# EAGLE board LUZES_18Fv3 (EAGLE 5.06)
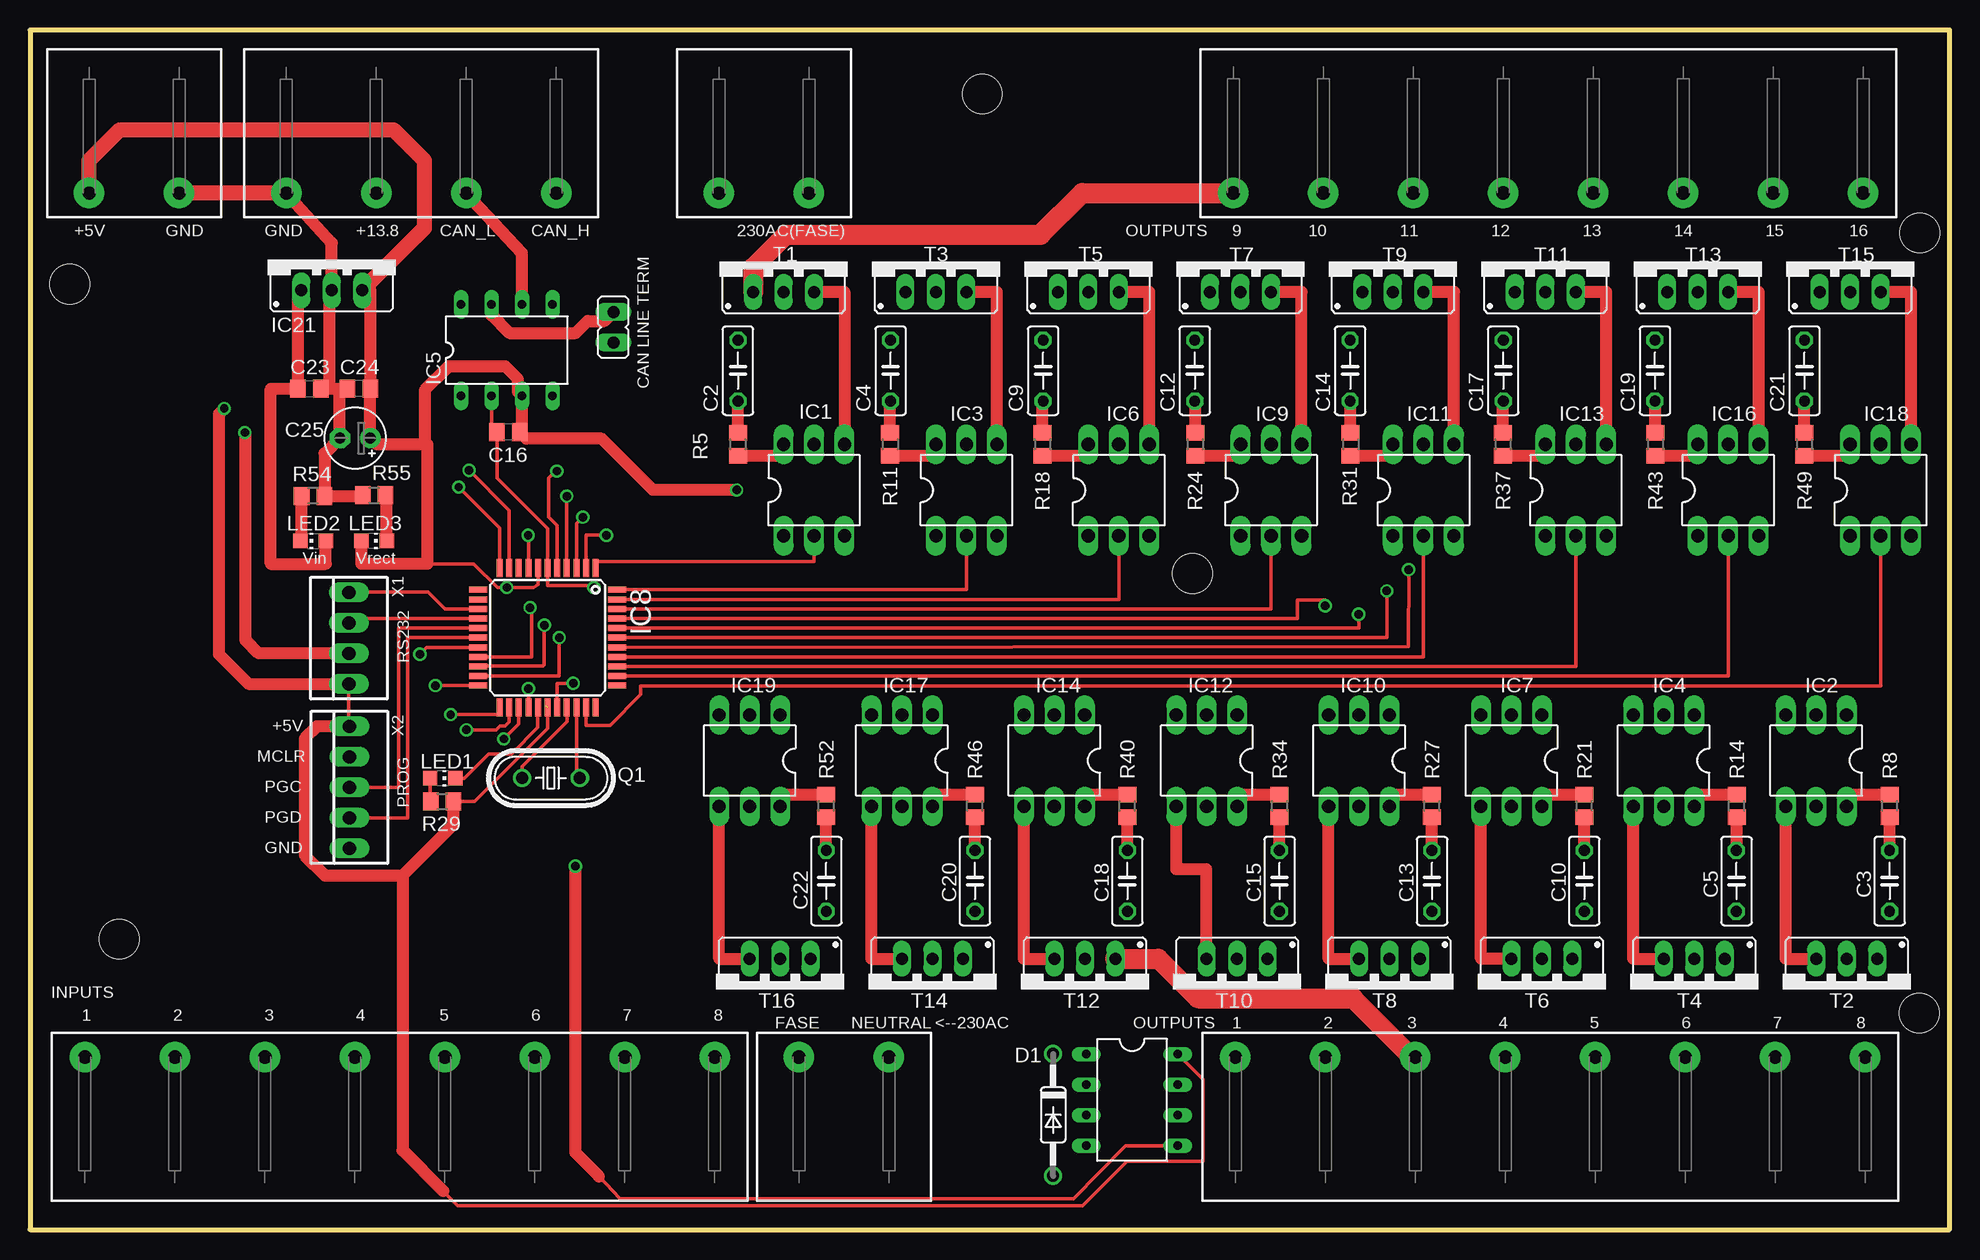
[diagram p0: board, top side]
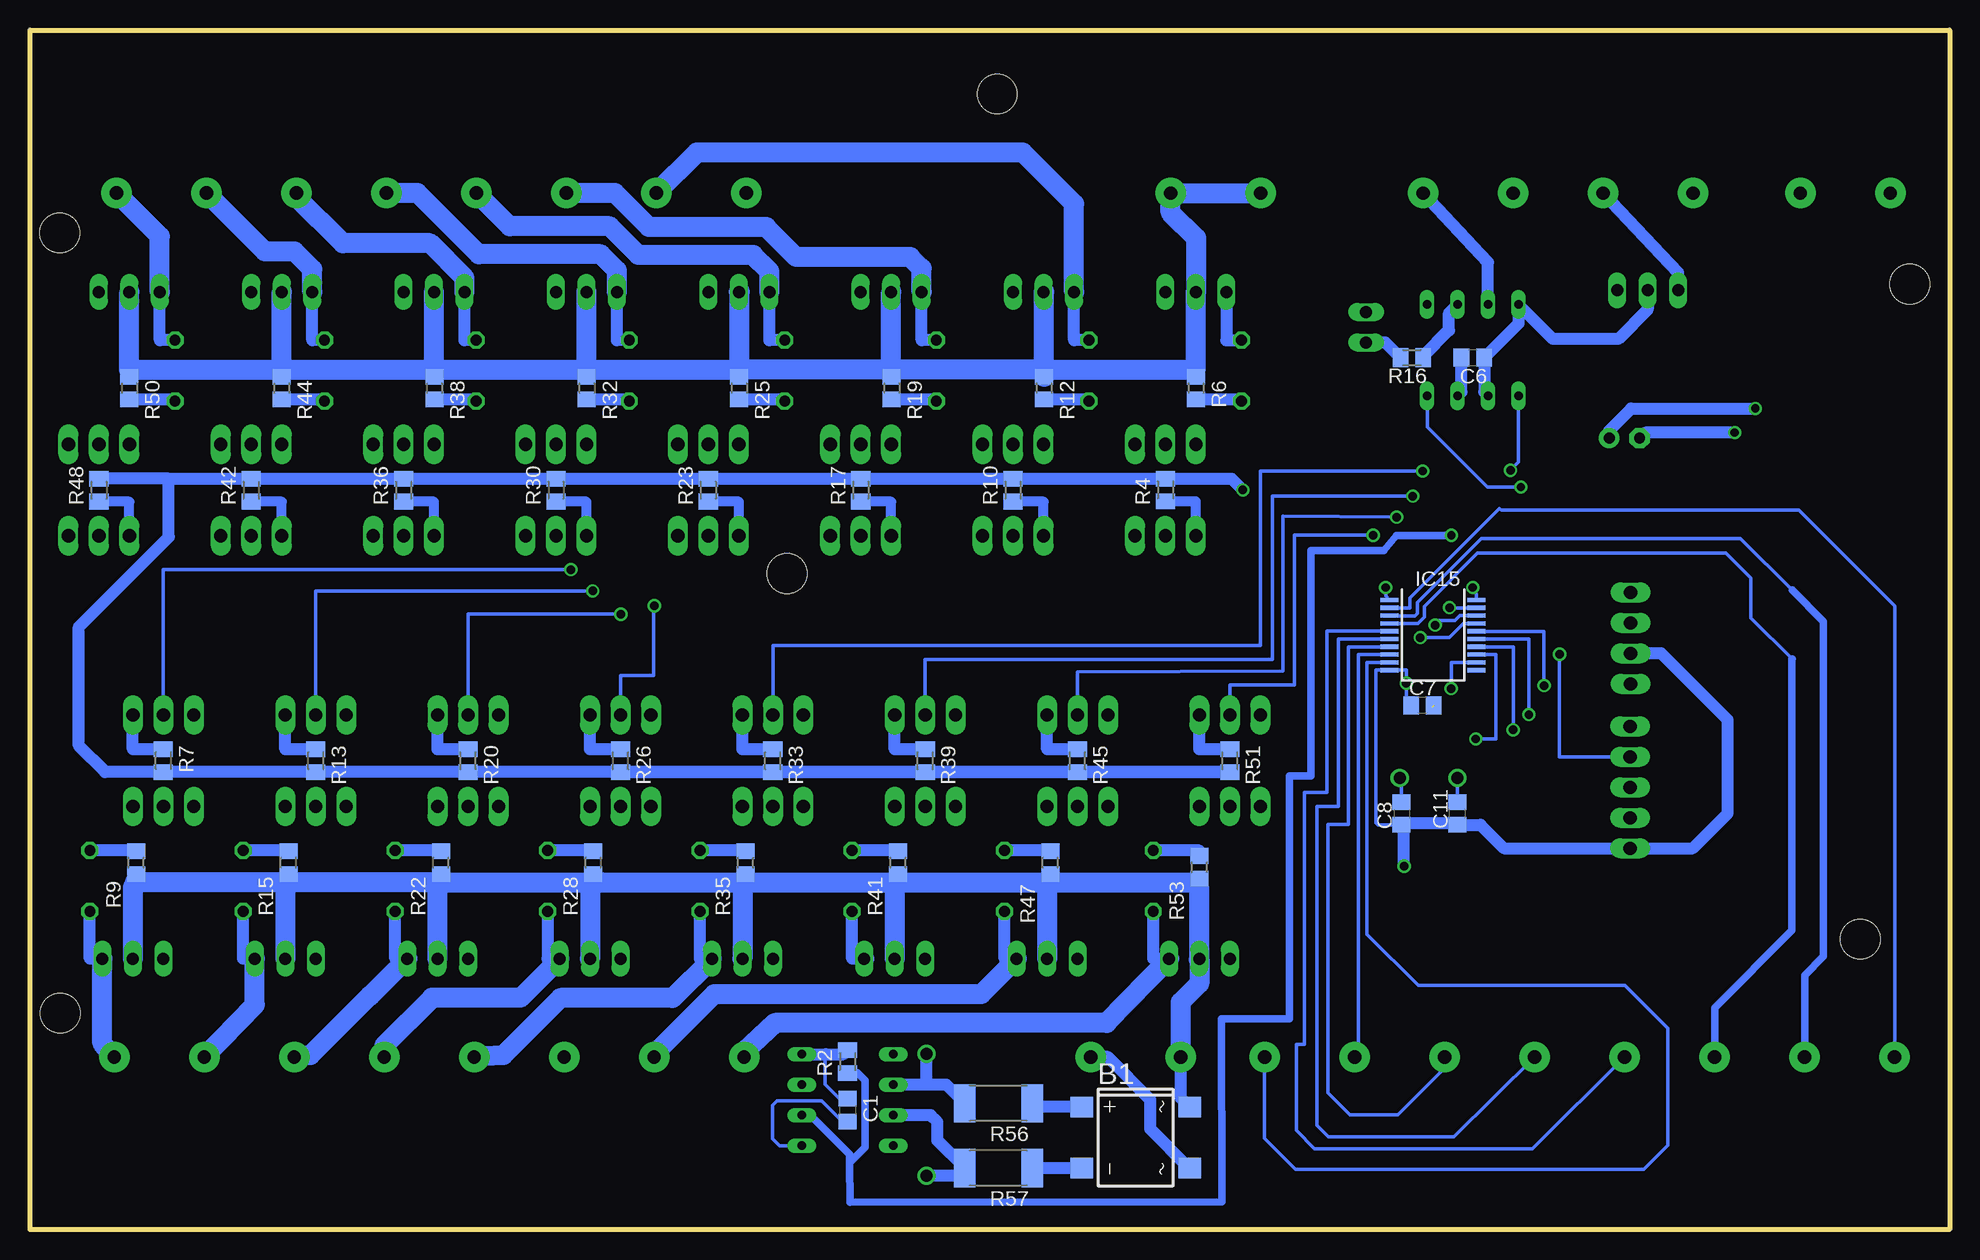
[diagram p1: board, bottom side, seen from below]

Size 160 x 100 mm. Coordinates in mm from the lower left corner, seen from the top.
Outline: 0,100 0,0 160,0 160,100 0,100
Copper layers (1*16): Top 0.035mm / dielectric 1.5mm / Bottom 0.035mm
Design rules "10mils": minimum track width 10mil, minimum drill 24mil, track to track 10mil, track to pad 10mil, pad to pad 10mil, via to via 10mil, smd to smd 10mil, copper to edge 40mil, drill to drill 10mil, minimum pad ring 10mil, minimum via ring 8mil, stop-mask expansion 0mil, vias tented up to drill 0mil, thermal gap 10mil
Holes 3.3 mm at 7.45,24.21 3.31,78.81 96.88,54.68 79.38,94.66 157.52,83.08 157.47,18.04

## Footprints (pad centres in the part's own frame; a part is rotated, then mirrored left to right if it is on the bottom)
DIL08 = drill 0.7 long: 1 -3.81,-3.81; 2 -1.27,-3.81; 3 1.27,-3.81; 4 3.81,-3.81; 5 3.81,3.81; 6 1.27,3.81; 7 -1.27,3.81; 8 -3.81,3.81
DBS = smd 1.7 x 1.9: + -2.55,-4.5; - 2.55,-4.5; AC1 -2.55,4.5; AC2 2.55,4.5
C0805 = smd 1.3 x 1.5: 1 -0.95,0; 2 0.95,0
C050-025X075 = drill 0.9 octagon: 1 -2.54,0; 2 2.54,0
E2,5-5 = drill 0.9 pad 1.7 round: + -1.27,0 | drill 0.9 pad 1.7 octagon: - 1.27,0
CTB9550-2 = drill 1.1 pad 2.54 round: P$1 0,0; P$2 7.5,0
CTB9550-4 = drill 1.1 pad 2.54 round: P$1 0,0; P$2 7.5,0; P$3 15,0; P$4 22.5,0
CTB9550-8 = drill 1.1 pad 2.54 round: P$9 0,0; P$10 7.5,0; P$11 15,0; P$12 22.5,0; P$13 30,0; P$14 37.5,0; P$15 45,0; P$16 52.5,0
JP1 = drill 1 long: 1 0,-1.27; 2 0,1.27
DO35-10 = drill 1 round: A 5.08,0; C -5.08,0
DIL06 = drill 1.1 long: 1 -2.54,-3.81; 2 0,-3.81; 3 2.54,-3.81; 4 2.54,3.81; 5 0,3.81; 6 -2.54,3.81
TQFP44@1 = smd 1.5 x 0.5: 1 -5.8,4; 2 -5.8,3.2; 3 -5.8,2.4; 4 -5.8,1.6; 5 -5.8,0.8; 6 -5.8,0; 7 -5.8,-0.8; 8 -5.8,-1.6; 9 -5.8,-2.4; 10 -5.8,-3.2; 11 -5.8,-4; 23 5.8,-4; 24 5.8,-3.2; 25 5.8,-2.4; 26 5.8,-1.6; 27 5.8,-0.8; 28 5.8,0; 29 5.8,0.8; 30 5.8,1.6; 31 5.8,2.4; 32 5.8,3.2; 33 5.8,4 | smd 0.5 x 1.5: 12 -4,-5.8; 13 -3.2,-5.8; 14 -2.4,-5.8; 15 -1.6,-5.8; 16 -0.8,-5.8; 17 0,-5.8; 18 0.8,-5.8; 19 1.6,-5.8; 20 2.4,-5.8; 21 3.2,-5.8; 22 4,-5.8; 34 4,5.8; 35 3.2,5.8; 36 2.4,5.8; 37 1.6,5.8; 38 0.8,5.8; 39 0,5.8; 40 -0.8,5.8; 41 -1.6,5.8; 42 -2.4,5.8; 43 -3.2,5.8; 44 -4,5.8
SSOP20_SMALL = smd 0.349 x 1.5: 1 -2.925,-3.625; 2 -2.275,-3.625; 3 -1.625,-3.625; 4 -0.975,-3.625; 5 -0.325,-3.625; 6 0.325,-3.625; 7 0.975,-3.625; 8 1.625,-3.625; 9 2.275,-3.625; 10 2.925,-3.625; 11 2.925,3.625; 12 2.275,3.625; 13 1.625,3.625; 14 0.975,3.625; 15 0.325,3.625; 16 -0.325,3.625; 17 -0.975,3.625; 18 -1.625,3.625; 19 -2.275,3.625; 20 -2.925,3.625
78XXS = drill 1 long: GND 0,-2.54; IN -2.54,-2.54; OUT 2.54,-2.54
CHIP-LED0805 = smd 1.2 x 1.2: A 0,-1.05; C 0,1.05
HC49U-V = drill 1 round: 1 -2.413,0; 2 2.413,0
M0805 = smd 1.3 x 1.6: 1 -0.95,0; 2 0.95,0
R0805 = smd 1.3 x 1.5: 1 -0.95,0; 2 0.95,0
R2512 = smd 1.8 x 3.2: 1 -2.8,0; 2 2.8,0
TO220DS = drill 1 long: A1 -2.54,-2.54; A2 0,-2.54; G 2.54,-2.54
22-23-2041 = drill 1.1 long: 1 -3.81,0; 2 -1.27,0; 3 1.27,0; 4 3.81,0
22-23-2051 = drill 1.1 long: 1 -5.08,0; 2 -2.54,0; 3 0,0; 4 2.54,0; 5 5.08,0

## Placement (x,y rotation side)
1  6N138  [DIL08]  91.86,10.8 270 top
B1  DBS107G  [DBS]  67.84,7.67 270 bottom
C1  100n  [C0805]  91.86,9.96 270 bottom
C2  0.05u  [C050-025X075]  59.01,71.6 90 top
C3  0.05u  [C050-025X075]  155.01,29.06 270 top
C4  0.05u  [C050-025X075]  71.74,71.6 90 top
C5  0.05u  [C050-025X075]  142.24,29.06 270 top
C6  100n  [C0805]  39.74,72.68 0 bottom
C7  100n  [C0805]  43.94,43.68 180 bottom
C8  22pF  [C0805]  45.67,34.68 270 bottom
C9  0.05u  [C050-025X075]  84.45,71.6 90 top
C10  0.05u  [C050-025X075]  129.56,29.06 270 top
C11  22pF  [C0805]  41.01,34.68 90 bottom
C12  0.05u  [C050-025X075]  97.09,71.6 90 top
C13  0.05u  [C050-025X075]  116.86,29.06 270 top
C14  0.05u  [C050-025X075]  110.05,71.6 90 top
C15  0.05u  [C050-025X075]  104.16,29.06 270 top
C16  100n  [C0805]  39.88,66.47 180 top
C17  0.05u  [C050-025X075]  122.81,71.6 90 top
C18  0.05u  [C050-025X075]  91.47,29.06 270 top
C19  0.05u  [C050-025X075]  135.45,71.6 90 top
C20  0.05u  [C050-025X075]  78.76,29.06 270 top
C21  0.05u  [C050-025X075]  147.91,71.6 90 top
C22  0.05u  [C050-025X075]  66.37,29.06 270 top
C23  100n  [C0805]  23.29,70.1 0 top
C24  100n  [C0805]  27.41,70.1 180 top
C25  47u  [E2,5-5]  27.1,65.98 180 top
CAMDEN_2P1  [CTB9550-2]  71.59,14.38 180 top
CAMDEN_2P2  [CTB9550-2]  57.42,86.41 0 top
CAMDEN_2P3  [CTB9550-2]  4.93,86.41 0 top
CAMDEN_4P-1  [CTB9550-4]  21.37,86.41 0 top
CAMDEN_8P-1  [CTB9550-8]  100.29,86.42 0 top
CAMDEN_8P-2  [CTB9550-8]  152.97,14.38 180 top
CAMDEN_8P-3  [CTB9550-8]  57.08,14.38 180 top
CAN_LINE_TERM  [JP1]  48.63,75.22 180 top
D1  1N4148  [DO35-10]  85.28,9.56 270 top
IC1  MOC3022  [DIL06]  65.35,61.64 0 top
IC2  MOC3022  [DIL06]  148.88,39.09 180 top
IC3  MOC3022  [DIL06]  78.05,61.64 0 top
IC4  MOC3022  [DIL06]  136.18,39.09 180 top
IC5  MCP2551  [DIL08]  39.74,73.31 0 top
IC6  MOC3022  [DIL06]  90.75,61.64 0 top
IC7  MOC3022  [DIL06]  123.48,39.09 180 top
IC8  PIC18F4682  [TQFP44@1]  43.14,49.34 270 top
IC9  MOC3022  [DIL06]  103.45,61.64 0 top
IC10  MOC3022  [DIL06]  110.78,39.09 180 top
IC11  MOC3022  [DIL06]  116.15,61.64 0 top
IC12  MOC3022  [DIL06]  98.08,39.09 180 top
IC13  MOC3022  [DIL06]  128.85,61.64 0 top
IC14  MOC3022  [DIL06]  85.38,39.09 180 top
IC15  MAX6818  [SSOP20_SMALL]  43.05,49.55 270 bottom
IC16  MOC3022  [DIL06]  141.55,61.64 0 top
IC17  MOC3022  [DIL06]  72.68,39.09 180 top
IC18  MOC3022  [DIL06]  154.25,61.64 0 top
IC19  MOC3022  [DIL06]  59.98,39.09 180 top
IC21  [78XXS]  25.16,80.84 0 top
LED1  [CHIP-LED0805]  34.4,37.61 270 top
LED2  [CHIP-LED0805]  23.6,57.4 90 top
LED3  [CHIP-LED0805]  28.68,57.4 270 top
Q1  10MHz  [HC49U-V]  43.42,37.63 0 top
R2  2K21  [M0805]  91.86,14.01 90 bottom
R4  330  [M0805]  65.36,61.65 90 bottom
R5  360  [R0805]  59,65.45 270 top
R6  470  [R0805]  62.81,70.15 270 bottom
R7  330  [M0805]  148.88,39.09 270 bottom
R8  360  [R0805]  155.01,35.31 90 top
R9  470  [R0805]  151.15,30.58 90 bottom
R10  330  [M0805]  78.06,61.64 90 bottom
R11  360  [R0805]  71.7,65.45 270 top
R12  470  [R0805]  75.47,70.15 270 bottom
R13  330  [M0805]  136.18,39.08 270 bottom
R14  360  [R0805]  142.26,35.31 90 top
R15  470  [R0805]  138.45,30.58 90 bottom
R16  120  [M0805]  44.82,72.68 180 bottom
R17  330  [M0805]  90.75,61.64 90 bottom
R18  360  [R0805]  84.4,65.45 270 top
R19  470  [R0805]  88.17,70.15 270 bottom
R20  330  [M0805]  123.48,39.08 270 bottom
R21  360  [R0805]  129.56,35.31 90 top
R22  470  [R0805]  125.75,30.58 90 bottom
R23  330  [M0805]  103.45,61.64 90 bottom
R24  360  [R0805]  97.13,65.45 270 top
R25  470  [R0805]  100.88,70.15 270 bottom
R26  330  [M0805]  110.78,39.08 270 bottom
R27  360  [R0805]  116.86,35.31 90 top
R28  470  [R0805]  113.05,30.58 90 bottom
R29  560  [R0805]  34.35,35.69 0 top
R30  330  [M0805]  116.16,61.64 90 bottom
R31  360  [R0805]  110.08,65.45 270 top
R32  470  [R0805]  113.59,70.15 270 bottom
R33  330  [M0805]  98.09,39.08 270 bottom
R34  360  [R0805]  104.16,35.31 90 top
R35  470  [R0805]  100.35,30.58 90 bottom
R36  330  [M0805]  128.86,61.64 90 bottom
R37  360  [R0805]  122.78,65.45 270 top
R38  470  [R0805]  126.29,70.15 270 bottom
R39  330  [M0805]  85.38,39.08 270 bottom
R40  360  [R0805]  91.46,35.31 90 top
R41  470  [R0805]  87.65,30.58 90 bottom
R42  330  [M0805]  141.57,61.64 90 bottom
R43  360  [R0805]  135.48,65.45 270 top
R44  470  [R0805]  139.02,70.15 270 bottom
R45  330  [M0805]  72.69,39.08 270 bottom
R46  360  [R0805]  78.76,35.31 90 top
R47  470  [R0805]  74.95,30.58 90 bottom
R48  330  [M0805]  154.25,61.64 90 bottom
R49  360  [R0805]  147.9,65.45 270 top
R50  470  [R0805]  151.71,70.15 270 bottom
R51  330  [M0805]  59.98,39.09 270 bottom
R52  360  [R0805]  66.37,35.31 90 top
R53  470  [R0805]  62.52,30.2 90 bottom
R54  560  [R0805]  23.6,61.16 180 top
R55  560  [R0805]  28.68,61.21 0 top
R56  20K  [R2512]  79.27,10.52 180 bottom
R57  20K  [R2512]  79.27,5.13 180 bottom
T1  BTA216  [TO220DS]  62.81,80.69 0 top
T2  BTA216  [TO220DS]  151.42,20.04 180 top
T3  BTA216->>  [TO220DS]  75.51,80.69 0 top
T4  BTA216  [TO220DS]  138.72,20.04 180 top
T5  BTA216  [TO220DS]  88.21,80.69 0 top
T6  BTA216  [TO220DS]  126.02,20.04 180 top
T7  BTA216  [TO220DS]  100.91,80.69 0 top
T8  BTA216  [TO220DS]  113.32,20.04 180 top
T9  BTA216  [TO220DS]  113.61,80.69 0 top
T10  BTA216  [TO220DS]  100.62,20.04 180 top
T11  BTA216  [TO220DS]  126.31,80.69 0 top
T12  BTA216  [TO220DS]  87.92,20.04 180 top
T13  BTA216  [TO220DS]  139.01,80.69 0 top
T14  BTA216  [TO220DS]  75.22,20.04 180 top
T15  BTA216  [TO220DS]  151.71,80.69 0 top
T16  BTA216  [TO220DS]  62.52,20.04 180 top
X1  22-23-2041  [22-23-2041]  26.58,49.3 90 top
X2  22-23-2051  [22-23-2051]  26.63,36.86 90 top

## Library data of the parts
1 = optocoupler
B1 = rectifier
C1-C25 R2 R4-R57 = rcl
CAMDEN_2P1-CAMDEN_2P3 CAMDEN_4P-1 CAMDEN_8P-1-CAMDEN_8P-3 = mycomponents
CAN_LINE_TERM = jumper
D1 = diode
IC1-IC4 IC6 IC7 IC9-IC14 IC16-IC19 = ic-package
IC5 = micro-philips
IC8 = microchip
IC15 = maxim
IC21 = v-reg
LED1-LED3 = led
Q1 = crystal
T1-T16 = triac
X1 X2 = con-molex

## Nets
+5V: 1.8 C1.1 C6.1 C7.1 C16.1 C24.1 C25.+ CAMDEN_2P3.P$1 IC5.3 IC8.7 IC8.28 IC15.20 IC21.OUT LED3.A R2.2 R4.2 R7.2 R10.2 R13.2 R17.2 R20.2 R23.2 R26.2 R29.2 R30.2 R33.2 R36.2 R39.2 R42.2 R45.2 R48.2 R51.2 X1.1 X2.5
+18V: 1.6 IC8.8 R2.1
CAN_H: CAMDEN_4P-1.P$4 CAN_LINE_TERM.1 IC5.7
CAN_L: CAMDEN_4P-1.P$3 IC5.6 R16.1
CAN_RX(TTL): IC5.4 IC8.11
CAN_TX(TTL): IC5.1 IC8.10
GND: 1.5 C1.2 C6.2 C7.2 C8.2 C11.1 C16.2 C23.2 C24.2 C25.- CAMDEN_2P3.P$2 CAMDEN_4P-1.P$1 IC5.2 IC5.8 IC8.6 IC8.29 IC15.1 IC15.10 IC21.GND R54.1 R55.1 X1.2 X2.1
INPUT1: IC8.19 IC15.19
INPUT2: IC8.20 IC15.18
INPUT3: IC8.21 IC15.17
INPUT4: IC8.22 IC15.16
INPUT5: IC8.23 IC15.15
INPUT6: IC8.24 IC15.14
INPUT7: IC8.25 IC15.13
INPUT8: IC8.26 IC15.12
MCLR: IC8.18 X2.4
N$1: C8.1 IC8.31 Q1.2
N$2: C11.2 IC8.30 Q1.1
N$3: B1.AC1 CAMDEN_2P1.P$2 R9.1 R15.1 R22.1 R28.1 R35.1 R41.1 R47.1 R53.1 T2.A2 T4.A2 T6.A2 T8.A2 T10.A2 T12.A2 T14.A2 T16.A2
N$4: B1.AC2 CAMDEN_2P1.P$1
N$5: B1.+ R56.1
N$6: CAMDEN_8P-3.P$16 IC15.2
N$7: CAMDEN_8P-3.P$15 IC15.3
N$8: CAMDEN_8P-3.P$9 IC15.9
N$9: CAMDEN_8P-3.P$10 IC15.8
N$10: CAMDEN_8P-3.P$11 IC15.7
N$11: CAMDEN_8P-3.P$14 IC15.4
N$12: CAMDEN_8P-3.P$13 IC15.5
N$13: CAMDEN_8P-3.P$12 IC15.6
N$16: IC3.6 R11.2
N$17: IC6.6 R18.2
N$18: IC9.6 R24.2
N$20: IC2.6 R8.2
N$25: IC4.6 R14.2
N$27: IC11.6 R31.2
N$29: IC13.6 R37.2
N$30: IC16.6 R43.2
N$33: IC17.6 R46.2
N$34: IC14.6 R40.2
N$35: IC12.6 R34.2
N$36: IC10.6 R27.2
N$37: IC7.6 R21.2
N$38: LED1.A R29.1
N$39: IC8.27 LED1.C
N$40: IC18.6 R49.2
N$41: IC19.6 R52.2
N$46: CAMDEN_2P2.P$1 CAMDEN_2P2.P$2 R6.1 R12.1 R19.1 R25.1 R32.1 R38.1 R44.1 R50.1 T1.A2 T3.A2 T5.A2 T7.A2 T9.A2 T11.A2 T13.A2 T15.A2
N$111: C23.1 CAMDEN_4P-1.P$2 IC21.IN LED2.A
N$112: LED2.C R54.2
N$115: LED3.C R55.2
N$116: 1.2 D1.C R56.2
N$117: B1.- R57.1
N$118: 1.3 D1.A R57.2
N$119: IC1.1 R4.1
N$120: IC1.6 R5.2
N$121: C2.1 R5.1 R6.2
N$123: IC1.4 T1.G
N$125: IC3.1 R10.1
N$127: C4.1 R11.1 R12.2
N$129: IC3.4 T3.G
N$131: IC6.1 R17.1
N$133: C9.1 R18.1 R19.2
N$135: IC6.4 T5.G
N$137: IC9.1 R23.1
N$139: C12.1 R24.1 R25.2
N$141: IC9.4 T7.G
N$143: IC11.1 R30.1
N$145: C14.1 R31.1 R32.2
N$147: IC11.4 T9.G
N$149: IC13.1 R36.1
N$151: C17.1 R37.1 R38.2
N$153: IC13.4 T11.G
N$155: IC16.1 R42.1
N$157: C19.1 R43.1 R44.2
N$159: IC16.4 T13.G
N$161: IC18.1 R48.1
N$163: C21.1 R49.1 R50.2
N$165: IC18.4 T15.G
N$168: IC2.1 R7.1
N$170: C3.1 R8.1 R9.2
N$172: IC2.4 T2.G
N$174: IC4.1 R13.1
N$176: C5.1 R14.1 R15.2
N$178: IC4.4 T4.G
N$180: IC7.1 R20.1
N$182: C10.1 R21.1 R22.2
N$184: IC7.4 T6.G
N$186: IC10.1 R26.1
N$188: C13.1 R27.1 R28.2
N$190: IC10.4 T8.G
N$192: IC12.1 R33.1
N$194: C15.1 R34.1 R35.2
N$196: IC12.4 T10.G
N$198: IC14.1 R39.1
N$200: C18.1 R40.1 R41.2
N$202: IC14.4 T12.G
N$204: IC17.1 R45.1
N$206: C20.1 R46.1 R47.2
N$208: IC17.4 T14.G
N$210: IC19.1 R51.1
N$212: C22.1 R52.1 R53.2
N$214: IC19.4 T16.G
N$217: CAN_LINE_TERM.2 R16.2
OUT1: IC8.32 IC18.2
OUT2: IC8.35 IC16.2
OUT3: IC8.36 IC13.2
OUT4: IC8.37 IC11.2
OUT5: IC8.42 IC9.2
OUT6: IC6.2 IC8.43
OUT7: IC3.2 IC8.44
OUT8: IC1.2 IC8.1
OUT9: IC2.2 IC8.38
OUT10: IC4.2 IC8.39
OUT11: IC7.2 IC8.40
OUT12: IC8.41 IC10.2
OUT13: IC8.5 IC12.2
OUT14: IC8.4 IC14.2
OUT15: IC8.3 IC17.2
OUT16: IC8.2 IC19.2
OUTPUT1: C22.2 CAMDEN_8P-2.P$16 T16.A1
OUTPUT2: C20.2 CAMDEN_8P-2.P$15 T14.A1
OUTPUT3: C18.2 CAMDEN_8P-2.P$14 T12.A1
OUTPUT4: C15.2 CAMDEN_8P-2.P$13 T10.A1
OUTPUT5: C13.2 CAMDEN_8P-2.P$12 T8.A1
OUTPUT6: C10.2 CAMDEN_8P-2.P$11 T6.A1
OUTPUT7: C5.2 CAMDEN_8P-2.P$10 T4.A1
OUTPUT8: C3.2 CAMDEN_8P-2.P$9 T2.A1
OUTPUT9: C2.2 CAMDEN_8P-1.P$9 T1.A1
OUTPUT10: C4.2 CAMDEN_8P-1.P$10 T3.A1
OUTPUT11: C9.2 CAMDEN_8P-1.P$11 T5.A1
OUTPUT12: C12.2 CAMDEN_8P-1.P$12 T7.A1
OUTPUT13: C14.2 CAMDEN_8P-1.P$13 T9.A1
OUTPUT14: C17.2 CAMDEN_8P-1.P$14 T11.A1
OUTPUT15: C19.2 CAMDEN_8P-1.P$15 T13.A1
OUTPUT16: C21.2 CAMDEN_8P-1.P$16 T15.A1
PGC: IC8.16 X2.3
PGD: IC8.17 X2.2
RS232_RX: IC8.14 X1.4
RS232_TX: IC8.15 X1.3

## Tracks (layer width: path | path; a pad name or v marks a point on that pad's centre or on a via)
+5V  (via drill 0.7)  (1 unrouted)
  Top 0.305: IC8.28 43.16,43.52 43.16,42.49 43.16,41.76 37.08,35.69 R29.2 | X1.1 26.58,41.99 X2.5 | C16.1 41,66.65 | IC8.7 42.35,53.77 41.97,53.51 v39.74,53.52 39.64,53.51 38.98,53.51 36.99,55.49 33.12,55.49 | 34.45,3.2 35.65,2 87.73,2 91.43,5.7 97.76,5.7 97.76,12.52 1.8
  Top 1.016: 32.91,65.44 28.9,65.44 C25.+ 28.37,69.47 C24.1 28.36,78.3 IC21.OUT | LED3.A 27.63,55.49 33.12,55.49 33.12,65.44 32.91,65.44 | 41,66.65 IC5.3 40.68,69.82 40.68,70.89 39.63,71.94 34.89,71.94 32.91,69.96 32.91,65.44 | C16.1 41.38,65.92 47.66,65.92 51.93,61.65 v58.9,61.65 | X1.1 18.21,45.49 15.74,47.97 15.74,68 v16.18,68.44 | X2.5 23.92,41.94 22.91,40.93 22.91,31.2 24.6,29.52 31.05,29.52 | 31.05,29.52 35.3,33.77 R29.2 | 31.05,29.52 31.05,6.59 34.45,3.2 | 1.8 95.16,14.61
  Top 1.27: CAMDEN_2P3.P$1 4.93,89.14 7.47,91.68 30.33,91.68 32.87,89.14 32.87,83.47 IC21.OUT
  Bottom 0.305: C1.1 92.53,10.91 93.74,12.12 93.74,14.55 93.68,14.61 | IC15.20 39.42,52.98 v39.74,53.52
  Bottom 0.813: R10.2 78.06,62.6
  Bottom 1.016: 78.06,62.6 R4.2 59.85,62.6 v58.9,61.65 | R10.2 R17.2 R23.2 R30.2 R36.2 R42.2 148.43,62.59 | 148.43,62.59 R48.2 | R20.2 R26.2 R33.2 R39.2 R45.2 R51.2 153.73,38.14 155.92,40.33 155.92,50.24 148.43,57.73 148.43,62.59 | R20.2 | R20.2 R13.2 | R13.2 | R13.2 R7.2 | C6.1 40.68,69.82 IC5.3 | v16.18,68.44 26.52,68.44 28.37,66.6 C25.+ | R2.2 92.21,14.61 93.68,14.61 1.8
+18V  (via drill 0.7)
  Top 0.305: IC8.8 41.54,57.85 v41.52,57.87
  Bottom 0.61: v41.52,57.87 46.09,57.87 47.14,56.62 53.24,56.62 53.24,37.82 55.03,37.82 55.03,17.57 60.69,17.57 60.66,2.33 91.66,2.28 91.69,5.55 | R2.1 91.01,13.06 90.38,12.43 90.38,6.86 91.69,5.55 | 91.69,5.55 91.69,6.27 94.95,9.53 1.6
CAN_H
  Top 1.016: CAN_LINE_TERM.1 47.88,75.74 46.49,75.74 45.48,74.73 39.94,74.73 38.46,76.21 IC5.7
  Bottom 1.016: IC5.7 38.46,80.63 CAMDEN_4P-1.P$4
CAN_L
  Top 1.016: CAMDEN_4P-1.P$3 41,81.4 IC5.6
  Bottom 1.016: IC5.6 41.72,76.41 41.72,74.97 43.86,72.83 R16.1
CAN_RX(TTL)  (via drill 0.7)
  Top 0.305: IC8.11 39.14,58.48 v35.73,61.89
  Bottom 0.305: v35.73,61.89 38.53,61.89 43.53,66.89 43.53,69.49 IC5.4
CAN_TX(TTL)  (via drill 0.7)
  Top 0.305: v36.6,63.3 39.94,59.96 IC8.10
  Bottom 0.305: IC5.1 35.92,63.97 v36.6,63.3
GND  (via drill 0.7)
  Top 0.305: v47,53.52 46.59,53.7 43.15,53.7 43.14,53.71 IC8.6 43.14,58.43 38.93,62.65 C16.2 38.46,66.94 IC5.2 | v45.28,45.53 43.94,45.53 IC8.29 | 47.43,4.43 49.18,2.57 86.98,2.57 91.29,6.99 1.5
  Top 1.016: CAMDEN_4P-1.P$1 25.16,82.24 IC21.GND 24.99,78.14 24.99,70.08 | 24.99,70.08 24.97,70.1 C23.2 | 25.81,70.08 C24.2 | 25.81,70.08 24.99,70.08 | 25.81,70.08 25.83,70.06 C25.- 24.55,64.7 R54.1 27.73,61.16 R55.1 | X1.2 19.07,48.03 17.96,49.14 17.96,66.38 v17.9,66.44 | v45.46,30.3 45.46,6.4 47.43,4.43
  Top 1.27: CAMDEN_4P-1.P$1 CAMDEN_2P3.P$2
  Bottom 0.305: IC15.1 46.99,52.79 v47,53.52 | 47.82,33.9 47.82,46.63 IC15.10 45.28,46.63 v45.28,45.53 45.28,44.07 C7.2 | C11.1 40.98,34.02 | C1.2 92.31,9.01 94.04,10.75 97.71,10.75 98.12,10.34 98.12,7.58 97.51,6.97 95.69,6.97 1.5 | 47.82,33.9 47.82,46.31 | C8.2 47.66,33.73 47.82,33.9
  Bottom 1.016: IC21.GND 25.16,76.71 27.62,74.25 33.05,74.25 IC5.8 35.92,75.54 C6.2 38.78,69.82 IC5.2 | v17.9,66.44 25.37,66.44 C25.- | X1.2 24.03,48.03 18.49,42.48 18.49,34.69 21.4,31.77 26.62,31.77 X2.1 37.13,31.78 39.1,33.75 C11.1 41.15,33.88 45.46,33.88 | v45.46,30.3 45.46,33.88 | 45.46,33.88 C8.2
INPUT1  (via drill 0.7)
  Top 0.305: v41.68,51.85 41.82,51.85 41.82,47.71 37.34,47.71 IC8.19
  Bottom 0.305: IC15.19 41.68,51.83 v41.68,51.85
INPUT2  (via drill 0.7)
  Top 0.305: v42.87,50.39 42.87,47.08 42.78,46.99 37.39,46.99 IC8.20
  Bottom 0.305: IC15.18 40.83,51.18 41.23,50.77 42.85,50.77 v42.87,50.39
INPUT3  (via drill 0.7)
  Top 0.305: v44.11,49.35 44.11,46.14 IC8.21
  Bottom 0.305: IC15.17 40.52,50.53 41.7,49.35 v44.11,49.35
INPUT4  (via drill 0.7)
  Top 0.305: v33.8,45.35 v33.8,45.34 IC8.22
  Bottom 0.305: IC15.16 39.42,49.86 33.8,49.86 v33.8,45.35
INPUT5  (via drill 0.7)
  Top 0.305: v35.06,42.93 39.14,42.93 IC8.23
  Bottom 0.305: IC15.15 35.06,49.23 v35.06,42.93
INPUT6  (via drill 0.7)
  Top 0.305: v36.37,41.65 38.87,41.65 39.2,41.99 39.62,41.99 39.93,42.3 IC8.24
  Bottom 0.305: IC15.14 36.37,48.58 v36.37,41.65
INPUT7  (via drill 0.7)
  Top 0.305: IC8.25 40.74,42.15 v39.48,40.89
  Bottom 0.305: v39.48,40.89 37.8,40.89 37.8,47.94 IC15.13
INPUT8  (via drill 0.7)
  Top 0.305: IC8.26 41.54,45.4 v41.54,45.1
  Bottom 0.305: v41.54,45.1 41.54,47.28 IC15.12
MCLR  (via drill 0.7)
  Top 0.305: v32.51,47.97 33.08,48.54 IC8.18
  Bottom 0.305: X2.4 32.51,39.4 v32.51,47.97
N$1
  Top 0.305: IC8.31 45.54,37.92 Q1.2
  Bottom 0.305: C8.1 45.67,37.47 Q1.2
N$2
  Top 0.305: IC8.30 44.75,43.53 44.75,42.35 41,38.6 Q1.1
  Bottom 0.305: C11.2 Q1.1
N$3
  Bottom 0.305: R15.1 138.45,29.07 138.58,28.94 | R9.1 151.15,29.02 151.23,28.94 | R22.1 125.75,29.01 125.68,28.94 | R28.1 113.03,29.63 112.34,28.94 | R35.1 100.35,29.05 100.46,28.94 | R41.1 87.65,29.03 87.56,28.94 | R47.1 74.95,29.03 74.86,28.94 | R53.1 62.52,29.06 62.64,28.94
  Bottom 1.016: CAMDEN_2P1.P$2 64.09,10.96 B1.AC1
  Bottom 1.676: T16.A2 62.54,22.58 62.54,28.46 62.64,28.46 62.64,28.94 74.86,28.94 75.2,28.94 | 125.53,28.94 125.68,28.94 138.33,28.94 | 138.33,28.94 138.58,28.94 151.23,28.94 151.23,28.75 151.42,28.56 T2.A2 | 125.53,28.94 112.73,28.94 | 112.73,28.94 112.34,28.94 100.46,28.94 100.36,28.94 | 100.36,28.94 87.81,28.94 | 87.81,28.94 87.56,28.94 75.2,28.94 | T14.A2 75.22,28.92 75.2,28.94 | T12.A2 87.92,28.83 87.81,28.94 | T10.A2 100.62,28.69 100.36,28.94 | T8.A2 113.32,28.35 112.73,28.94 | T6.A2 126.02,28.45 125.53,28.94 | T4.A2 138.72,28.55 138.33,28.94 | T16.A2 62.6,22.5 | CAMDEN_2P1.P$2 64.09,18.95 62.53,20.51 62.53,22.57 T16.A2
N$4
  Bottom 1.016: CAMDEN_2P1.P$1 70.16,14.38 66.6,10.82 66.6,8.38 B1.AC2
N$5
  Bottom 1.016: B1.+ 76.16,10.22 R56.1
N$6
  Bottom 0.305: IC15.2 44.97,51.83 44.97,52.64 37.5,60.11 37.35,59.96 12.55,59.96 4.57,51.99 CAMDEN_8P-3.P$16
N$7
  Bottom 0.305: IC15.3 46.63,51.14 44.56,51.14 44.34,51.36 44.34,52.29 39.02,57.61 17.42,57.61 13.12,53.31
  Bottom 0.61: 13.12,53.31 10.52,50.71 10.52,22.76 12.08,21.21 CAMDEN_8P-3.P$15
N$8
  Bottom 0.305: IC15.9 48.55,47.28 48.55,24.62 44.28,20.34 27.07,20.34 23.49,16.76 23.49,7 25.48,5.01 54.52,5.01 57.11,7.6 57.11,14.42 CAMDEN_8P-3.P$9
N$9
  Bottom 0.305: IC15.8 49.28,47.93 49.28,14.75 CAMDEN_8P-3.P$10
N$10
  Bottom 0.305: IC15.7 50.09,48.58 50.09,33.77 51.81,33.77 51.81,11.39 49.99,9.57 45.99,9.57 42.07,13.49 CAMDEN_8P-3.P$11
N$11
  Bottom 0.305: IC15.4 44.31,50.52 43.78,51.05 43.78,51.95 39.34,56.39 18.64,56.39 16.55,54.3 16.55,50.99 13.12,47.56
  Bottom 0.61: 13.12,47.56 13.13,47.56 13.13,24.94 19.57,18.49 CAMDEN_8P-3.P$14
N$12
  Bottom 0.305: IC15.5 51.89,49.88 51.89,36.43 53.78,36.43 53.78,15.43 54.44,15.43 54.44,8.26 52.93,6.74 34.78,6.74 CAMDEN_8P-3.P$13
N$13
  Bottom 0.305: IC15.6 50.95,49.23 50.95,35.28 52.73,35.28 52.73,8.68 51.76,7.71 41.31,7.71 CAMDEN_8P-3.P$12
N$16
  Top 1.016: R11.2 75.51,64.5 IC3.6
N$17
  Top 1.016: R18.2 88.21,64.5 IC6.6
N$18
  Top 1.016: R24.2 100.91,64.5 IC9.6
N$20
  Top 1.016: IC2.6 151.42,36.26 R8.2
N$25
  Top 1.016: IC4.6 138.72,36.26 R14.2
N$27
  Top 1.016: R31.2 113.61,64.5 IC11.6
N$29
  Top 1.016: R37.2 126.31,64.5 IC13.6
N$30
  Top 1.016: R43.2 139.01,64.5 IC16.6
N$33
  Top 1.016: IC17.6 75.22,36.26 R46.2
N$34
  Top 1.016: IC14.6 87.92,36.26 R40.2
N$35
  Top 1.016: IC12.6 100.62,36.26 R34.2
N$36
  Top 1.016: IC10.6 113.32,36.26 R27.2
N$37
  Top 1.016: IC7.6 126.02,36.26 R21.2
N$38
  Top 0.305: 33.46,35.75 R29.1 33.35,35.74 LED1.A
N$39
  Top 0.305: LED1.C 36.2,37.61 38.25,39.66 40.13,39.66 42.31,41.84 42.31,42.43 42.32,42.44 42.32,43.51 IC8.27
N$40
  Top 1.016: R49.2 151.71,64.5 IC18.6
N$41
  Top 1.016: IC19.6 62.52,36.26 R52.2
N$46
  Bottom 0.305: R25.1 100.88,71.65 100.85,71.65 | R19.1 88.17,71.7 88.24,71.7 | 113.61,71.65 113.61,71.1 | 126.29,71.65 R38.1 | 139.01,71.65 139.01,71.1 | 151.71,71.65 R50.1 | 62.81,71.7 R6.1
  Bottom 1.016: 139.01,71.1 R44.1 | R38.1 126.31,71.1 | 113.61,71.1 R32.1
  Bottom 1.676: R12.1 75.47,71.7 | 75.47,71.7 75.95,71.7 | 75.95,71.7 88.24,71.7 | 88.24,71.7 100.85,71.7 | 100.85,71.7 100.85,78.15 T7.A2 | T5.A2 88.21,71.7 88.24,71.7 | 75.47,71.7 75.47,78.15 T3.A2 | 100.85,71.7 100.85,71.65 113.75,71.65 | 113.75,71.65 126.29,71.65 | T9.A2 113.61,71.65 113.75,71.65 | T11.A2 126.31,71.65 126.29,71.65 | 139.01,71.65 T13.A2 | 126.29,71.65 139.01,71.65 | 139.01,71.65 151.71,71.65 | 151.71,71.65 T15.A2 | 151.71,71.65 151.77,71.65 | 75.95,71.7 62.81,71.7 T1.A2 62.79,78.18 62.79,82.66 64.92,84.79 CAMDEN_2P2.P$2 CAMDEN_2P2.P$1
N$111
  Top 1.016: IC21.IN 22.34,78.02 C23.1 20.06,70.1 20.06,55.49 24.65,55.49 LED2.A
  Bottom 1.016: IC21.IN 22.62,79.78 CAMDEN_4P-1.P$2
N$112
  Top 1.016: R54.2 22.65,57.4 LED2.C
N$115
  Top 1.016: LED3.C 29.73,61.21 R55.2
N$116
  Bottom 1.016: R56.2 83.62,12.07 85.33,12.07 | 85.33,12.07 1.2 | D1.C 85.28,12.12 85.33,12.07
N$117
  Bottom 1.016: B1.- R57.1
N$118
  Bottom 1.016: 1.3 84.93,9.53 84.36,8.96 84.36,7.41 R57.2 82.06,5.11 82.06,4.35 82.18,4.48 D1.A
N$119
  Bottom 0.813: R4.1 62.81,60.7 IC1.1
N$120
  Top 1.016: R5.2 62.81,64.5 IC1.6
N$121
  Top 1.016: R5.1 C2.1
  Bottom 1.016: C2.1 59.01,69.2 R6.2
N$123
  Top 1.016: IC1.4 67.89,78.15 T1.G
N$125
  Bottom 0.813: R10.1 75.51,60.69 IC3.1
N$127
  Top 1.016: R11.1 71.7,69.06 C4.1
  Bottom 1.016: C4.1 71.74,69.2 R12.2
N$129
  Top 1.016: IC3.4 80.59,78.15 T3.G
N$131
  Bottom 0.813: R17.1 88.21,60.69 IC6.1
N$133
  Top 1.016: R18.1 84.4,69.06 C9.1
  Bottom 1.016: C9.1 84.45,69.2 R19.2
N$135
  Top 1.016: IC6.4 93.29,78.15 T5.G
N$137
  Bottom 0.813: R23.1 100.91,60.69 IC9.1
N$139
  Top 1.016: R24.1 97.13,69.06 C12.1
  Bottom 1.016: C12.1 97.09,69.2 R25.2
N$141
  Top 1.016: IC9.4 105.99,78.15 T7.G
N$143
  Bottom 0.813: R30.1 113.61,60.69 IC11.1
N$145
  Top 1.016: R31.1 110.08,69.06 C14.1
  Bottom 1.016: C14.1 110.04,69.2 R32.2
N$147
  Top 1.016: T9.G 118.69,78.15 IC11.4
N$149
  Bottom 0.813: R36.1 126.31,60.69 IC13.1
N$151
  Top 1.016: R37.1 122.78,69.06 C17.1
  Bottom 1.016: C17.1 122.81,69.2 R38.2
N$153
  Top 1.016: T11.G 131.39,78.15 IC13.4
N$155
  Bottom 0.813: R42.1 139.01,60.69 IC16.1
N$157
  Top 1.016: R43.1 135.48,69.06 C19.1
  Bottom 1.016: C19.1 135.45,69.2 R44.2
N$159
  Top 1.016: T13.G 144.09,78.15 IC16.4
N$161
  Bottom 0.813: R48.1 151.71,60.69 IC18.1
N$163
  Top 1.016: R49.1 C21.1
  Bottom 1.016: C21.1 147.91,69.2 R50.2
N$165
  Top 1.016: T15.G 156.79,78.15 IC18.4
N$168
  Bottom 1.016: R7.1 151.42,40.04 IC2.1
N$170
  Top 1.016: R8.1 C3.1
  Bottom 1.016: R9.2 151.15,31.6 C3.1
N$172
  Top 1.016: T2.G 146.34,22.58 IC2.4
N$174
  Bottom 1.016: R13.1 138.72,40.03 IC4.1
N$176
  Top 1.016: R14.1 142.26,31.6 C5.1
  Bottom 1.016: R15.2 138.45,31.6 C5.1
N$178
  Top 1.016: T4.G 133.64,22.58 IC4.4
N$180
  Bottom 1.016: R20.1 126.02,40.03 IC7.1
N$182
  Top 1.016: R21.1 C10.1
  Bottom 1.016: R22.2 125.75,31.6 C10.1
N$184
  Top 1.016: T6.G 120.94,22.58 IC7.4
N$186
  Bottom 1.016: R26.1 113.32,40.03 IC10.1
N$188
  Top 1.016: R27.1 C13.1
  Bottom 1.016: R28.2 113.05,31.6 C13.1
N$190
  Top 1.016: T8.G 108.24,22.58 IC10.4
N$192
  Bottom 1.016: R33.1 100.62,40.03 IC12.1
N$194
  Top 1.016: R34.1 C15.1
  Bottom 1.016: R35.2 100.35,31.6 C15.1
N$196
  Top 1.016: IC12.4 95.54,30.04 98.06,30.04 98.06,22.58 T10.G
N$198
  Bottom 1.016: R39.1 87.92,40.03 IC14.1
N$200
  Top 1.016: R40.1 C18.1
  Bottom 1.016: R41.2 87.65,31.6 C18.1
N$202
  Top 1.016: T12.G 82.84,22.58 IC14.4
N$204
  Bottom 1.016: R45.1 75.22,40.03 IC17.1
N$206
  Top 1.016: R46.1 C20.1
  Bottom 1.016: R47.2 74.95,31.6 C20.1
N$208
  Top 1.016: T14.G 70.14,22.58 IC17.4
N$210
  Bottom 1.016: R51.1 62.52,40.04 IC19.1
N$212
  Top 1.016: R52.1 C22.1
  Bottom 1.016: R53.2 62.52,31.6 C22.1
N$214
  Top 1.016: T16.G 57.44,22.58 IC19.4
N$217
  Bottom 1.016: R16.2 47.03,73.95 CAN_LINE_TERM.2
OUT1
  Top 0.305: IC18.2 154.25,45.3 50.9,45.3 50.9,44.6 48.34,42.04 46.34,42.04 IC8.32
OUT2
  Top 0.305: IC16.2 141.55,46.14 IC8.35
OUT3
  Top 0.305: IC13.2 128.85,46.94 IC8.36
OUT4
  Top 0.305: IC11.2 116.15,47.74 IC8.37
OUT5
  Top 0.305: IC9.2 103.45,51.74 IC8.42
OUT6
  Top 0.305: IC6.2 90.75,52.54 IC8.43
OUT7
  Top 0.305: IC3.2 78.05,53.34 IC8.44
OUT8
  Top 0.305: IC1.2 65.35,55.7 47.12,55.7 47.12,55.14 IC8.1
OUT9  (via drill 0.7)
  Top 0.305: v114.93,55.01 114.91,48.59 IC8.38
  Bottom 0.305: IC2.2 148.89,55.01 v114.93,55.01
OUT10  (via drill 0.7)
  Top 0.305: v113.09,53.24 113.09,49.34 IC8.39
  Bottom 0.305: IC4.2 136.2,53.24 114.01,53.24 113.91,53.24 v113.09,53.24
OUT11  (via drill 0.7)
  Top 0.305: v110.75,51.3 110.75,50.14 IC8.40
  Bottom 0.305: IC7.2 123.48,51.3 v110.75,51.3
OUT12  (via drill 0.7)
  Top 0.305: v107.96,52 107.96,52.49 105.65,52.49 105.65,50.94 IC8.41
  Bottom 0.305: IC10.2 110.78,46.2 108.03,46.2 108.03,52 v107.96,52
OUT13  (via drill 0.7)
  Top 0.305: v43.92,63.23 43.8,63.23 43.22,62.65 43.22,59.39 43.92,58.69 43.92,55.16 IC8.5
  Bottom 0.305: IC12.2 98.08,48.67 57.42,48.67 57.42,63.23 v43.92,63.23
OUT14  (via drill 0.7)
  Top 0.305: v44.73,61.14 IC8.4
  Bottom 0.305: IC14.2 85.38,47.51 56.45,47.51 56.45,61.14 v44.73,61.14
OUT15  (via drill 0.7)
  Top 0.305: IC8.3 45.54,58.85 v46.09,59.39
  Bottom 0.305: IC17.2 72.68,46.46 55.58,46.55 55.58,59.47 v46.09,59.39
OUT16  (via drill 0.7)
  Top 0.305: v48.05,57.88 46.34,57.88 IC8.2
  Bottom 0.305: IC19.2 59.98,45.41 54.61,45.41 54.61,57.88 v48.05,57.88
OUTPUT1
  Bottom 1.016: T16.A1 66.37,22.58 C22.2
  Bottom 1.676: CAMDEN_8P-2.P$16 100.47,14.8 97.9,17.21 70.27,17.21 T16.A1
OUTPUT2
  Bottom 1.016: T14.A1 78.76,22.58 C20.2
  Bottom 1.676: CAMDEN_8P-2.P$15 107.97,14.61 102.97,19.61 80.73,19.61 T14.A1
OUTPUT3
  Top 1.676: CAMDEN_8P-2.P$14 115.03,14.54 110.28,19.29 97.35,19.29 94.06,22.58 T12.A1
  Bottom 1.016: T12.A1 91.47,22.58 C18.2
  Bottom 1.676: T12.A1 90.47,22.59
OUTPUT4
  Bottom 1.016: T10.A1 104.16,22.58 C15.2
  Bottom 1.676: CAMDEN_8P-2.P$13 120.55,14.54 115.79,19.3 106.45,19.3 T10.A1
OUTPUT5
  Bottom 1.016: T8.A1 116.86,22.58 C13.2
  Bottom 1.676: CAMDEN_8P-2.P$12 130.47,15.35 126.49,19.33 119.11,19.33 T8.A1
OUTPUT6
  Bottom 1.016: T6.A1 129.56,22.58 C10.2
  Bottom 1.676: CAMDEN_8P-2.P$11 136.64,14.54 131.65,19.52 131.62,19.52 T6.A1
OUTPUT7
  Bottom 1.016: T4.A1 142.24,22.58 C5.2
  Bottom 1.676: CAMDEN_8P-2.P$10 141.26,18.74 T4.A1
OUTPUT8
  Bottom 1.016: T2.A1 155.01,22.58 C3.2
  Bottom 1.676: CAMDEN_8P-2.P$9 153.96,15.53 T2.A1
OUTPUT9
  Top 1.676: T1.A1 60.27,80.2 63.01,82.93 84.24,82.93 87.72,86.41 100.28,86.41 CAMDEN_8P-1.P$9
  Bottom 1.016: T1.A1 60.27,74.14 C2.2
OUTPUT10
  Bottom 1.016: T3.A1 72.97,74.14 C4.2
  Bottom 1.676: T3.A1 72.97,85.51 77.24,89.78 104.43,89.78 CAMDEN_8P-1.P$10
OUTPUT11
  Bottom 1.016: T5.A1 85.67,74.14 C9.2
  Bottom 1.676: T5.A1 85.67,80.12 86.63,81.08 96.14,81.08 98.64,83.58 108.41,83.58 111.24,86.41 115.28,86.41 CAMDEN_8P-1.P$11
OUTPUT12
  Bottom 1.016: T7.A1 98.37,74.14 C12.2
  Bottom 1.676: T7.A1 98.37,79.9 99.72,81.24 109.28,81.24 111.67,83.64 120.01,83.64 CAMDEN_8P-1.P$12
OUTPUT13
  Bottom 1.016: C14.2 111.07,74.14 T9.A1
  Bottom 1.676: T9.A1 111.07,79.94 112.43,81.3 122.59,81.3 127.69,86.41 130.28,86.41 CAMDEN_8P-1.P$13
OUTPUT14
  Bottom 1.016: C17.2 123.77,74.14 T11.A1
  Bottom 1.676: CAMDEN_8P-1.P$14 137.79,86.11 133.9,82.21 126.65,82.21 123.77,79.33 T11.A1
OUTPUT15
  Bottom 1.016: C19.2 136.47,74.14 T13.A1
  Bottom 1.676: T13.A1 136.47,80.05 137.95,81.53 140.41,81.53 CAMDEN_8P-1.P$15
OUTPUT16
  Bottom 1.016: C21.2 149.17,74.14 T15.A1
  Bottom 1.676: T15.A1 149.17,82.8 CAMDEN_8P-1.P$16
PGC
  Top 0.305: X2.3 30.73,36.86 30.73,50.15 37.34,50.15 IC8.16
PGD
  Top 0.305: X2.2 31.46,34.32 31.46,49.34 IC8.17
RS232_RX
  Top 0.305: IC8.14 34.6,51.74 33.2,53.14 26.61,53.14 X1.4
RS232_TX
  Top 0.305: IC8.15 26.95,50.94 X1.3

## Text on the board
tNames: +5V | GND | GND | +13.8 | CAN_L | CAN_H | 230AC(FASE) | OUTPUTS | 9 | 10 | 11 | 12 | 13 | 14 | 15 | 16 | CAN LINE TERM | Vin | Vrect | RS232 | +5V | MCLR | PGC | PROG | PGD | GND | INPUTS | 1 | 2 | 3 | 4 | 5 | 6 | 7 | 8 | FASE | NEUTRAL | <--230AC | OUTPUTS | 1 | 2 | 3 | 4 | 5 | 6 | 7 | 8